# Altium PCB PCBByb2Aver3.PcbDoc
Units mm, origin at the board's own origin, x right, y up, seen from the top; angles counter-clockwise.
Board outline 179 x 104 mm, 2 copper layers (Top Layer, Bottom Layer); 73 components, 29 nets, 141 pads, 20 vias.
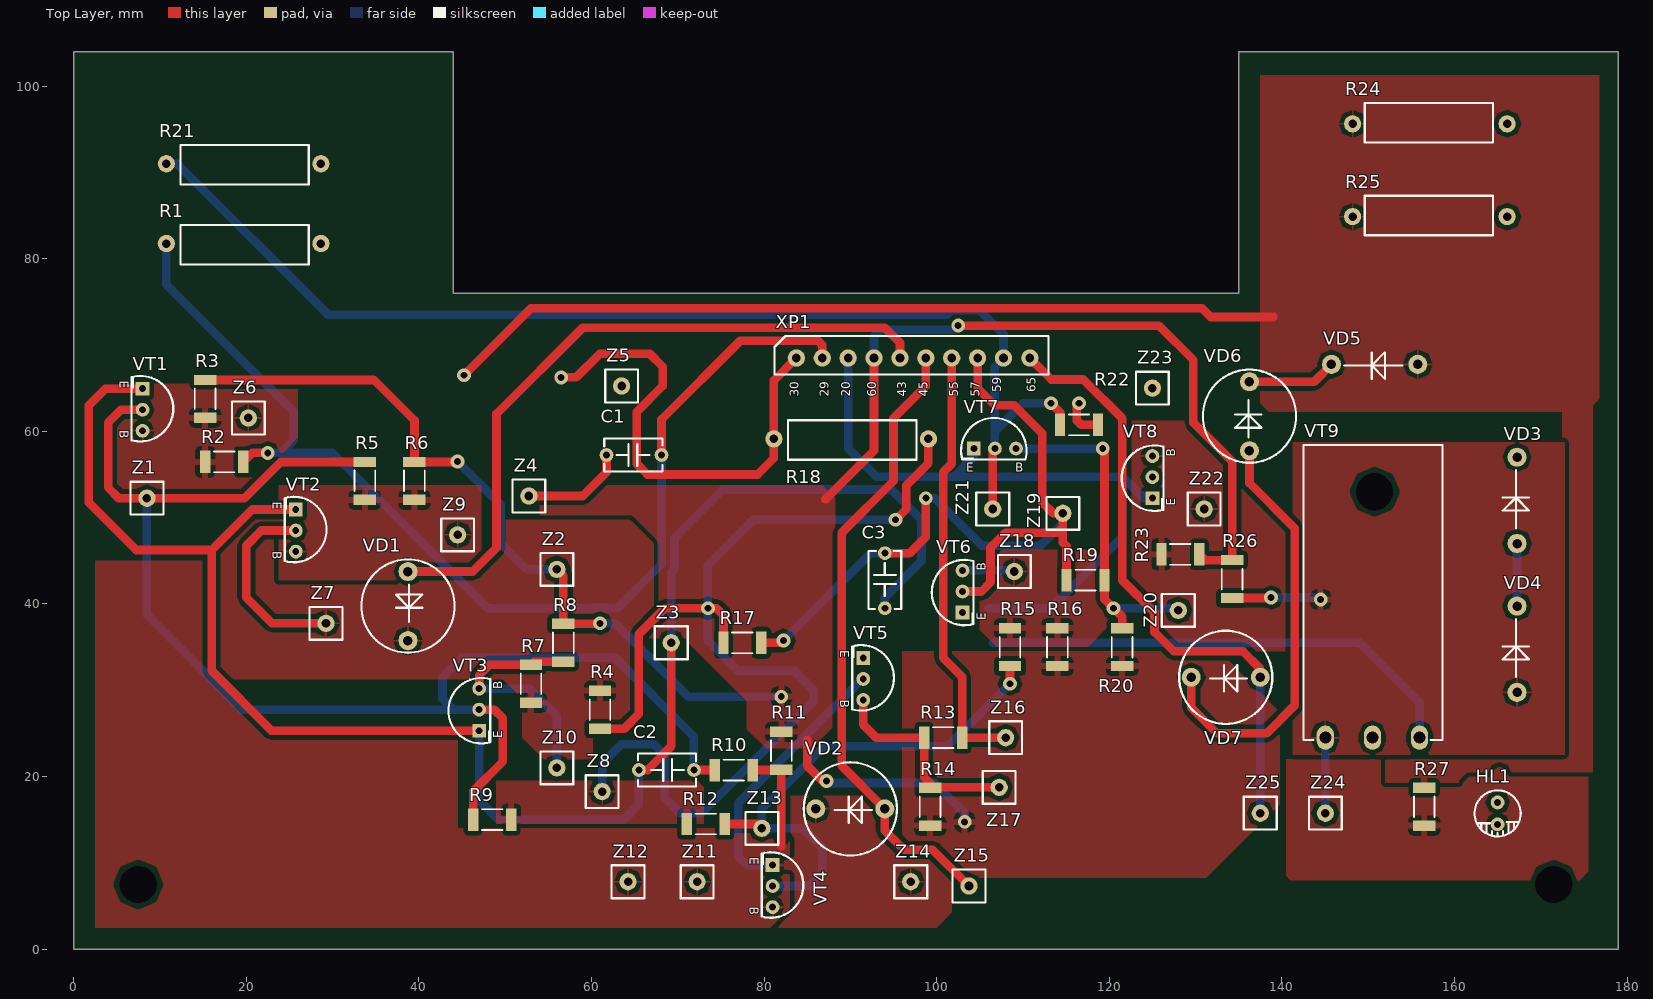
[diagram p0: Top Layer view]
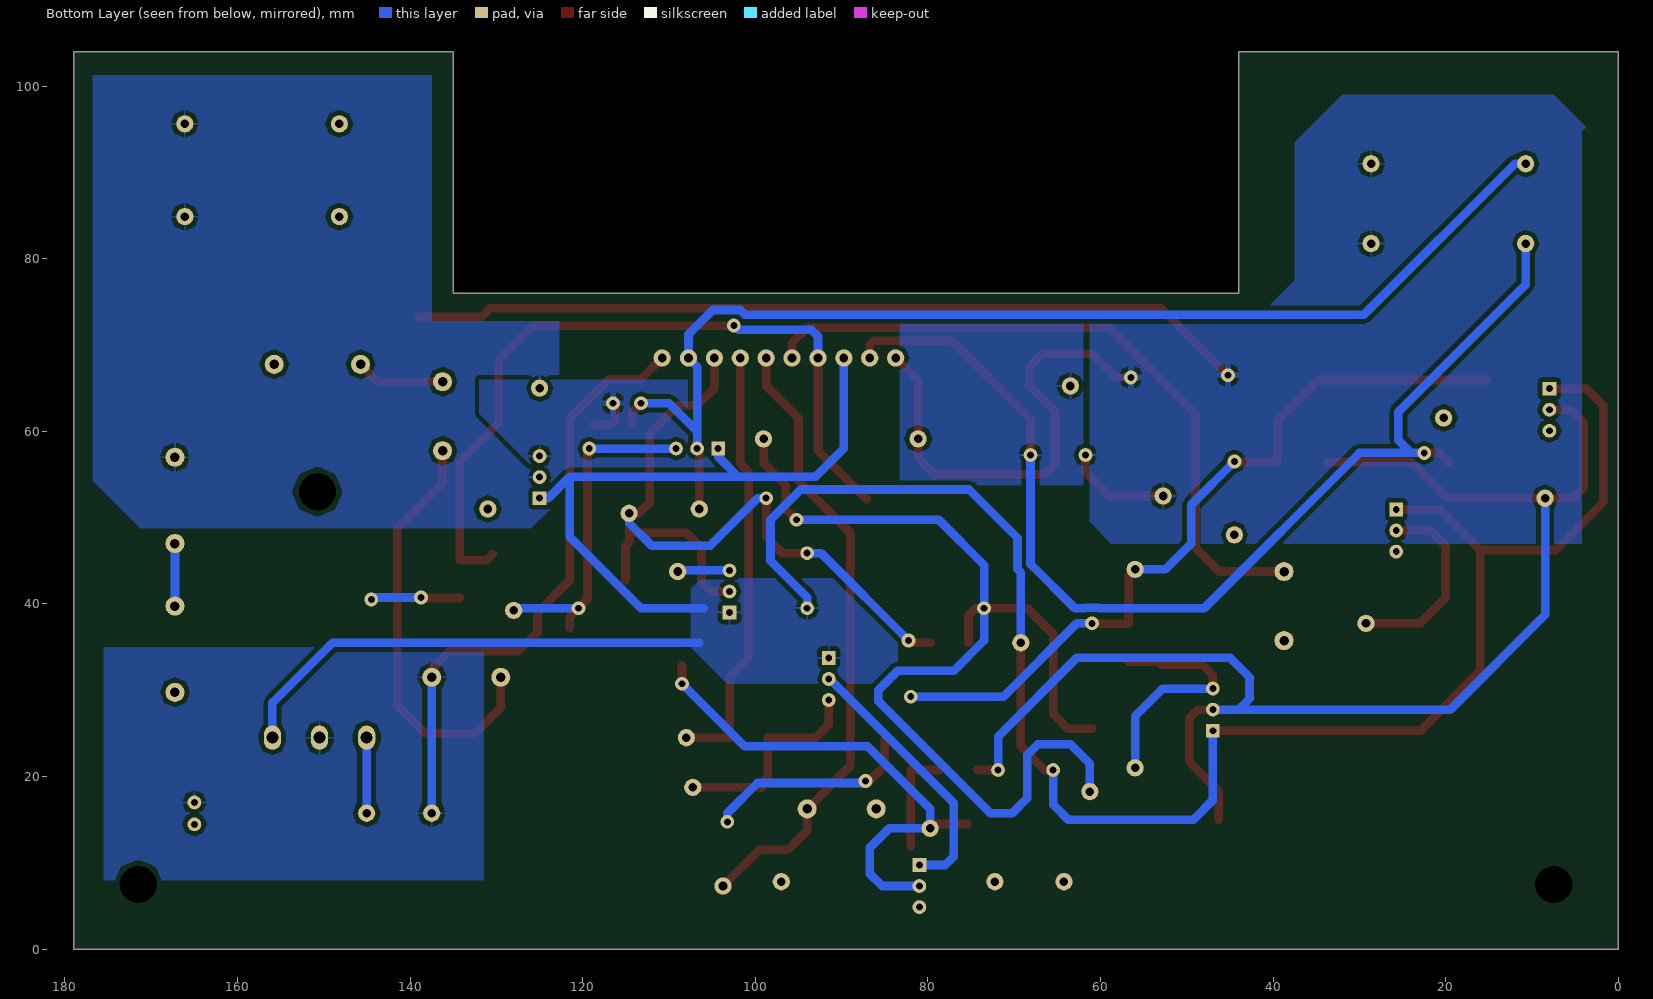
[diagram p1: Bottom Layer view, seen from below]
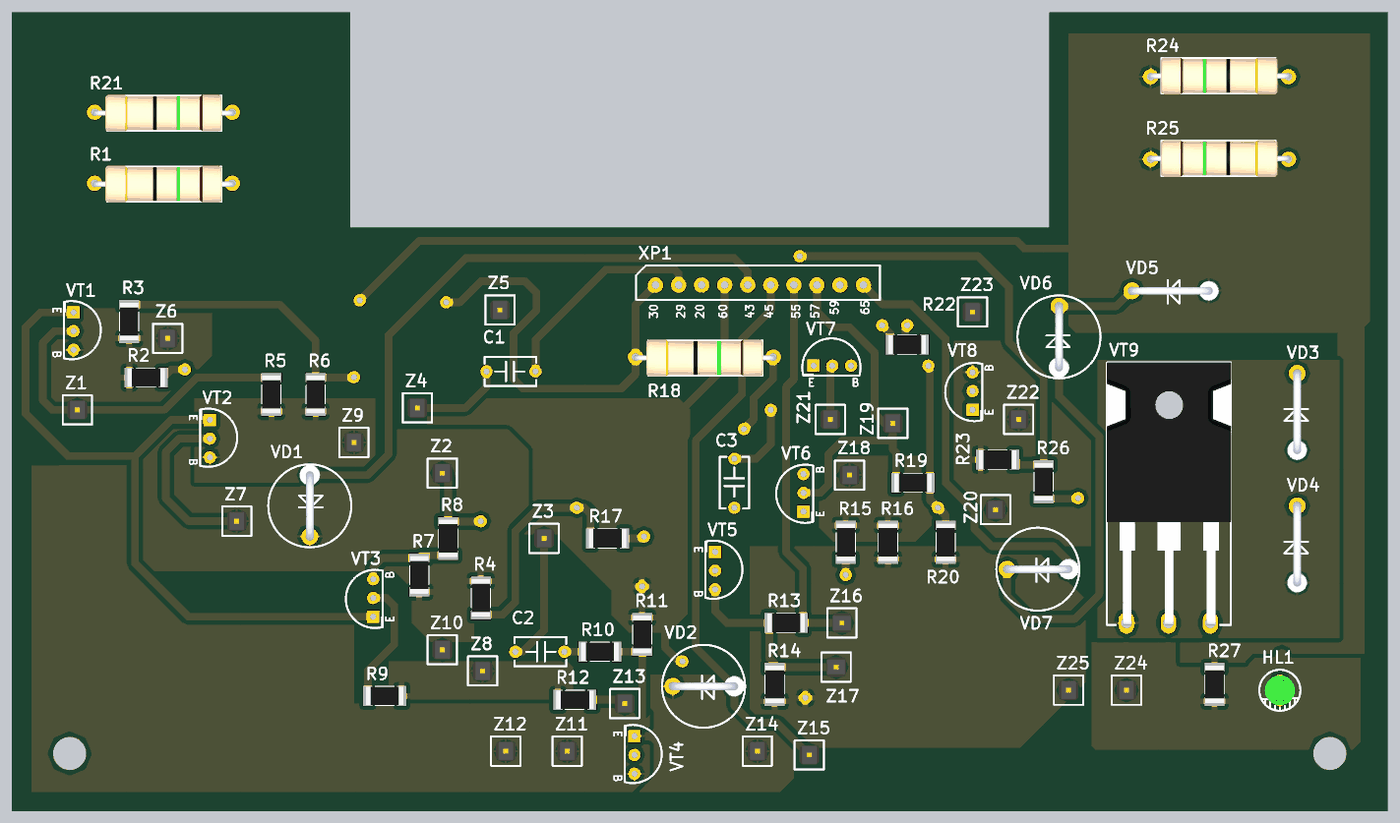
[diagram p2: 3D render of the assembled board from above, using the file's embedded part models]

## Layer stack, top to bottom
Top Solder: solder mask 0.0102, Solder Resist, Dk 3.5
Top Layer: signal copper 0.0356
Dielectric 1: dielectric 0.32, FR-4, Dk 4.8
Bottom Layer: signal copper 0.0356
Bottom Solder: solder mask 0.0102, Solder Resist, Dk 3.5

## Board outline
0,0 0,104 44,104 44,76 135,76 135,104 179,104 179,0

## Design rules (kind name [scope] priority, off if disabled: settings)
Clearance [All] p1: gap=0.5 ignorepadtopadclearanceinfootprint=FALSE
PlaneClearance [All] p1: clearance=0.75
PlaneConnect [All] p1: planeconnectstyle=Relief reliefexpansion=0.75 reliefentries=4 reliefconductorwidth=0.75 reliefairgap=0.5
PolygonConnect [All] p1: thpad.connectstyle=Relief thpad.reliefconductorwidth=0.254 thpad.reliefentries=4 thpad.polygonreliefangle="90 Angle" thpad.airgapwidth=0.5 smdpad.connectstyle=Relief smdpad.reliefconductorwidth=0.75 smdpad.reliefentries=4 smdpad.polygonreliefangle="90 Angle" smdpad.airgapwidth=0.5 via.connectstyle=Relief via.reliefconductorwidth=0.75 via.reliefentries=4 via.polygonreliefangle="90 Angle" via.airgapwidth=0.5
RoutingVias [All] p1: holewidth=0.8 width=1.6 viastyle="Through Hole" minholewidth=0.8 minwidth=1.6 maxholewidth=0.8 maxwidth=1.6
SolderMaskExpansion [All] p1: expansion=0.102
Width [All] p1: maxlimit=3 minlimit=0.5 preferedwidth=1.5
28 further rules are at their usual default settings.

## Components (designator, comment, footprint, x,y, rotation, side; value= is the part's Value field where it differs from the comment)
C1 "Capasitor" Capasitor 61.75,57.25 r0 top value=0.25uF
C2 "Capasitor" Capasitor 71.88,20.75 r180 top value=0.25uF
C3 "Capasitor" Capasitor 94,45.88 r270 top value=0.25uF
HL1 "Led" GNLR 165,17 r270 top
R1 "Resistor_1/2W" Resistor_2W 1.606,81.877 r0 top value=470
R2 "Resistor_1/2W" RESC5025L 17.45,56.45 r0 top value=1k2
R3 "Resistor_1/2W" RESC5025L 15.25,63.75 r270 top value=680
R4 "Resistor_1/2W" RESC5025L 61,27.75 r270 top value=820
R5 "Resistor_1/2W" RESC5025L 33.75,54.25 r90 top value=820
R6 "Resistor_1/2W" RESC5025L 39.5,54.25 r270 top value=3k9
R7 "Resistor_1/2W" RESC5025L 53,30.75 r270 top value=820
R8 "Resistor_1/2W" RESC5025L 56.75,35.5 r270 top value=3k9
R9 "Resistor_1/2W" RESC5025L 48.5,15 r0 top value=820
R10 "Resistor_1/2W" RESC5025L 76.5,20.75 r180 top value=820
R11 "Resistor_1/2W" RESC5025L 82,23 r270 top value=3k9
R12 "Resistor_1/2W" RESC5025L 73.25,14.5 r180 top value=820
R13 "Resistor_1/2W" RESC5025L 100.75,24.5 r0 top value=820
R14 "Resistor_1/2W" RESC5025L 99.25,16.5 r90 top value=3k9
R15 "Resistor_1/2W" RESC5025L 108.5,35 r270 top value=820
R16 "Resistor_1/2W" RESC5025L 114,35 r90 top value=3k9
R17 "Resistor_1/2W" RESC5025L 77.5,35.5 r180 top value=820
R18 "Resistor_1/2W" Resistor_2W 72,59.25 r0 top value=220
R19 "Resistor_1/2W" RESC5025L 117.25,42.75 r180 top value=560
R20 "Resistor_1/2W" RESC5025L 121.5,35 r90 top value=3k3
R21 "Resistor_1/2W" Resistor_2W 1.606,91.127 r0 top value=560
R22 "Resistor_1/2W" RESC5025L 116.5,60.75 r180 top value=560
R23 "Resistor_1/2W" RESC5025L 128.25,45.75 r180 top value=3k3
R24 "Resistor_1/2W" Resistor_2W 175.25,95.5 r180 top value=560
R25 "Resistor_1/2W" Resistor_2W 175.25,84.75 r180 top value=560
R26 "Resistor_1/2W" RESC5025L 134.25,42.88 r270 top value=560
R27 "Resistor_1/2W" RESC5025L 156.5,16.5 r270 top value=3k3
VD1 "Diode" DO-41-vertical 38.75,43.75 r270 top
VD2 "Diode" DO-41-vertical 94,16.25 r180 top
VD3 "Diode" DO-15-Vertical 167.25,47 r90 top
VD4 "Diode" DO-15-Vertical 167.25,29.75 r90 top
VD5 "Diode" DO-15-Vertical 155.75,67.75 r180 top
VD6 "stabilizater" DO-41-vertical 136.25,57.75 r90 top
VD7 "stabilizater" DO-41-vertical 137.5,31.5 r180 top
VT1 "Bipolar Transistor" TO-92 8,64.94 r270 top
VT2 "Bipolar Transistor" TO-92 25.75,50.94 r270 top
VT3 "Bipolar Transistor" TO-92 47,25.31 r90 top
VT4 "Bipolar Transistor" TO-92 81,9.75 r270 top
VT5 "Bipolar Transistor" TO-92 91.5,33.75 r270 top
VT6 "Bipolar Transistor" TO-92 103,39 r90 top
VT7 "Bipolar Transistor" TO-92 104.31,58 r0 top
VT8 "Bipolar Transistor" TO-92 125,52.25 r90 top
VT9 "2sb688" TO-247-3 145.04,24.5 r0 top
XP1 "Connector" Connector 83.75,68.5 r0 top
Z1 "point_control" point_control 8.5,52.25 r0 top
Z2 "point_control" point_control 56,44 r0 top
Z3 "point_control" point_control 69.25,35.5 r0 top
Z4 "point_control" point_control 52.75,52.5 r0 top
Z5 "point_control" point_control 63.5,65.25 r0 top
Z6 "point_control" point_control 20.25,61.55 r180 top
Z7 "point_control" point_control 29.25,37.75 r180 top
Z8 "point_control" point_control 61.25,18.25 r0 top
Z9 "point_control" point_control 44.5,48 r0 top
Z10 "point_control" point_control 56,21.007 r0 top
Z11 "point_control" point_control 72.25,7.81 r0 top
Z12 "point_control" point_control 64.25,7.81 r0 top
Z13 "point_control" point_control 79.75,14 r0 top
Z14 "point_control" point_control 97,7.81 r0 top
Z15 "point_control" point_control 103.75,7.31 r0 top
Z16 "point_control" point_control 108,24.5 r90 top
Z17 "point_control" point_control 107.25,18.75 r90 top
Z18 "point_control" point_control 109,43.75 r0 top
Z19 "point_control" point_control 114.63,50.5 r0 top
Z20 "point_control" point_control 128,39.25 r0 top
Z21 "point_control" point_control 106.5,51 r0 top
Z22 "point_control" point_control 131,51 r0 top
Z23 "point_control" point_control 125,65 r0 top
Z24 "point_control" point_control 145.04,15.75 r0 top
Z25 "point_control" point_control 137.5,15.75 r0 top

## Footprints (in the part's own frame and the unit in brackets; to place one, negate y for a bottom-side part, rotate by r counter-clockwise, add the part's x,y. Pads: shape width x height; smd on the part's side, far side on the other; paste and mask are expansions set on the pad)
Capasitor [mm]
  round 1.6 hole 0.8: 1(0,0) 2(6.38,0)
  silkscreen extent -0.25,-1.91 6.48,1.91, body extent -0.32,-2.93 6.58,2.98, height 7.17
Connector [mm]
  round 2 hole 1: 1(0,0) 2(3,0) 3(6,0) 4(9,0) 5(12,0) 6(15,0) 7(18,0) 8(21,0) 9(24,0) 10(27.051,0)
  silkscreen extent -2.54,-1.91 29.21,2.54
DO-15-Vertical [mm]
  round 2.2 hole 1.1: 1(0,0) 2(10,0)
  silkscreen extent 1.78,-1.4 8.51,1.65, body extent -1.3,-1.3 10.5,1.3, height 8.38
DO-41-vertical [mm]
  round 2.2 hole 1.1: 1(0,0) 2(8,0)
  silkscreen extent -1.4,-5.4 9.4,5.4, body extent -1.35,-1.35 8.5,1.35, height 12.1
GNLR [mm]
  round 1.6 hole 0.8: 1(0,0) 2(2.54,0)
  silkscreen extent -1.4,-2.67 3.94,2.67, body extent -0.68,-1.95 3.22,1.95, height 8
point_control [mm]
  round 2 hole 1: 1(0,0)
  silkscreen extent -1.91,-1.91 1.91,1.91, body extent -1.27,-1.27 1.27,1.27, height 10
RESC5025L [mm] "Chip Resistor, Body 5.0x2.5mm, IPC High Density"
  rect 1.2x2.6 smd: 1(-2.2,0) 2(2.2,0)
  silkscreen extent -1.2,-1.2 1.2,1.2, body extent -2.45,-1.2 2.45,1.2, height 0.55
Resistor_2W [mm]
  round 2 hole 1: 1(9.144,-0.127) 2(27.051,-0.127)
  silkscreen extent 10.79,-2.54 25.65,2.03, body extent 8.89,-2.62 27.38,2.16, height 5.02
TO-92 [mm]
  rect 1.6x1.6 hole 0.8: 1(0,0)
  round 1.6 hole 0.8: 2(2.44,0) 3(4.88,0)
  silkscreen extent -1.47,-1.27 6.11,3.56, body extent -0.38,-0.96 5.2,2.48, height 7.37
TO-247-3 [mm]
  oval 2x2.8 hole 1.4: 1(0,0) 2(5.46,0) 3(10.92,0)
  silkscreen extent -2.54,-0.25 13.59,33.91, body extent -2.54,-0.25 13.66,33.95, height 5.5

## Part data
C2 C3: Voltage=160B, Marka=ELM
HL1: Color=Green, Marka=АЛ-203
R1 R18 R21 R24 R25: package=5020, Power=2W
  R1: Marka=RES2010
  R18 R21 R24 R25: Marka=R2010
R2 R3: Power=0.5W
R4 R5 R6 R7 R8 R9 R10 R11 R12: package=2010, Power=0.5W
  R4: Marka=R5025
  R5 R7: Marka=R5020
  R6: Marka=RE5020
  R8 R9 R10 R11 R12: Marka=RES5020
R13 R14 R15 R16 R17 R19 R20 R22 R23 R26 R27: package=5020, Power=0.5W, Marka=R2010
VD1 VD2 VD6 VD7: package=DO-41
  VD1 VD2: Marka=HER105
  VD6 VD7: Marka=BZx85
VD3 VD4 VD5: package=DO-15, Marka=SF-28
VT9: package=TO-247, Marka=2SB688
C1: Marka=EMN1223
VT1: Marka=bc640

## Free pads (board coordinates)
  round 0 hole 4.3: 0(150.75,53)
  rect 1.6x1.6 hole 4.3: 0(171.5,7.5) 2(7.5,7.5)

## Via types
v1: diameter 1.6, hole 0.8, Top Layer to Bottom Layer, 20 vias

## Nets (pads, with @x,y where several pads share a name; then routed paths per layer and width w, separated by ;. In a path a pad name is that pad's centre, name@x,y a point inside that pad or via, vN(x,y) a via of type N, cw(c..) or ccw(c..) an arc to the next point about the centre after c; other vN are vias at no path point)
20: C2.2 C3.2 VT1.1 VT2.1 VT3.1 VT5.1 VT6.1 VT7.1 VT8.1 VT9.3 XP1.3 Z3.1 | length 334.8
  Top Layer w1: VT1.1 3.69,64.94 1.75,63 1.75,51.75 7.25,46.25 16,46.25 ; VT2.1 20.69,50.94 16,46.25 ; VT3.1 22.94,25.31 16,32.25 16,46.25 ; C2.2 66.5,20.75 69.25,23.5 Z3.1
  Bottom Layer w1: VT3.1 47,17.25 49.25,15 63.75,15 65.5,16.75 C2.2 ; Z3.1 69.25,43.629 69.63,44.009 69.63,47.63 75.25,53.25 94.75,53.25 98.25,49.75 98.25,45 94,40.75 C3.2 ; XP1.3 89.75,58 93,54.75 102,54.75 ; VT7.1 104.31,57.06 102,54.75 ; 106,39.5 113.25,39.5 121.5,47.75 121.5,54.75 ; 106.5,35.5 149,35.5 155.96,28.54 VT9.3 ; VT8.1 124,52.25 121.5,54.75 ; 102,54.75 121.5,54.75
29: C1.2 R1.1 R2.2 XP1.2 Z5.1 | length 130.4
  Top Layer w1: R2.2 20.7,57.5 v1(22.5,57.5) ; C1.2 68.13,61.38 77.25,70.5 86.25,70.5 86.75,70 XP1.2
  Bottom Layer w1: R1.1 10.75,77 25.5,62.25 25.5,59 24,57.5 ; v1(22.5,57.5) 24,57.5 ; C1.2 68.13,44.63 63,39.5 61.796,39.5 61.746,39.55 60.254,39.55 60.204,39.5 48,39.5 30,57.5 24,57.5
30: C1.1 R1.2 R18.1 R21.2 R24.2 R25.2 R27.1 VD5.1 XP1.1 Z4.1 | length 165.8
  Top Layer w1: v1(45.25,66.5) 53,74.25 130.75,74.25 131.75,73.25 139,73.25 ; Z4.1 59,52.5 61.75,55.25 C1.1 ; v1(56.5,66.25) 58.25,66.25 61,69 66.75,69 68.25,67.5 68.25,65.25 65.25,62.25 65.25,56.25 66.5,55 79.25,55 81.144,56.894 R18.1 81.144,65.894 XP1.1
  Bottom Layer w1: v1@56.25,66.5 v1(56.5,66.25)
40: R4.2 R9.2 R12.2 R17.2 R18.2 Z8.1 | length 128.8
  Top Layer w1: R4.2 63.8,25.55 65.5,27.25 65.5,36.5 68.5,39.5 v1(73.5,39.5) 74.5,39.5 75.3,38.7 R17.2 ; v1(95.25,49.75) 96.5,51 96.5,53.75 99.051,56.301 R18.2
  Bottom Layer w1: Z8.1 61.25,21.5 63.5,23.75 67.25,23.75 68.5,22.5 68.5,17.5 70.25,15.75 72.75,15.75 85.75,28.75 85.75,30 83.5,32.25 77,32.25 73.5,35.75 v1(73.5,39.5) 73.5,44.5 78.75,49.75 v1(95.25,49.75)
45: R2.1 R3.2 VT1.3 Z6.1
46: R5.1 R6.2 VT2.3 Z9.1
47: R4.1 R7.2 VD1.2 VT2.2 Z7.1 | length 23
  Top Layer w1: VT2.2 21.75,48.5 20,46.75 20,40.75 23,37.75 Z7.1
48: R7.1 R8.2 VT3.3 Z10.1 | length 28.3
  Top Layer w1: VT3.3 47,31.75 48.2,32.95 R7.1 53.35,33.3 R8.2
  Bottom Layer w1: VT3.3 52.81,30.19 56,27 Z10.1
50: C2.1 R5.2 R9.1 R10.2 VT1.2 VT3.2 Z1.1 | length 161.4
  Top Layer w1: VT1.2 5.5,62.5 4,61 4,53.5 5.25,52.25 Z1.1 19.796,52.25 23.996,56.45 R5.2 ; R9.1 46.3,18.3 49.75,21.75 49.75,26.75 48.75,27.75 VT3.2 ; C2.1 R10.2
  Bottom Layer w1: Z1.1 8.5,38.75 19.5,27.75 44,27.75 ; VT3.2 44,27.75 ; C2.1 71.88,24.62 62.75,33.75 45,33.75 42.75,31.5 42.75,29 44,27.75
51: R10.1 R11.2 VT4.3 Z11.1 Z12.1 | length 12.2
  Top Layer w1: R10.1 81.95,20.75 R11.2 82,11.918
52: VD2.2 VT4.1 VT5.2 Z14.1 | length 31
  Bottom Layer w1: VT4.1 78,9.75 77,10.75 77,16.916 91.394,31.31 VT5.2
53: R12.1 R15.2 VT4.2 Z13.1 | length 60.8
  Top Layer w1: R12.1 79.25,14.5 Z13.1 ; v1(108.5,30.75) R15.2
  Bottom Layer w1: VT4.2 85.31,7.31 86.75,8.75 86.75,11.75 84.5,14 Z13.1 79.75,16.25 87,23.5 101.25,23.5 v1(108.5,30.75)
56: R15.1 R16.2 VT6.3 Z18.1 | length 6.1
  Bottom Layer w1: VT6.3 108.87,43.88 Z18.1
57: C3.1 R17.1 R19.2 VT6.2 XP1.8 Z19.1 | length 98
  Top Layer w1: R17.1 82,35.5 v1(82.25,35.75) ; C3.1 96.88,45.88 98.75,47.75 v1(98.75,52.25) ; VT6.2 105.19,41.44 106.25,42.5 106.25,46.5 108,48.25 114,48.25 114.63,48.88 ; XP1.8 104.75,65 106.75,63 109,63 112.25,59.75 112.25,51.75 113.5,50.5 Z19.1 114.63,48.88 ; R19.2 115.05,46.7 114.63,47.12 114.63,48.88
  Bottom Layer w1: v1(82.25,35.75) 92.38,45.88 C3.1 ; v1(98.75,52.25) 99.75,52.25 105.25,46.75 112,46.75 114.63,49.38 Z19.1
58: R19.1 R20.2 VT7.3 Z20.1 | length 39.4
  Top Layer w1: v1(119.25,58) 119.45,57.8 R19.1 119.45,40.55 v1(120.5,39.5) 121.5,38.5 R20.2
  Bottom Layer w1: VT7.3 v1(119.25,58) ; v1(120.5,39.5) 127.75,39.5 Z20.1
59: R21.1 R22.2 VT7.2 XP1.9 Z21.1 | length 137.2
  Top Layer w1: Z21.1 106.5,57.75 VT7.2 ; v1(113.25,63.25) 114.3,62.2 R22.2
  Bottom Layer w1: R21.1 12,91 29.5,73.5 101.204,73.5 101.754,74.05 104.95,74.05 107.75,71.25 XP1.9 106.75,67.5 106.75,60 ; VT7.2 106.75,60 ; v1(113.25,63.25) 110,63.25 106.75,60
60: R3.1 R6.1 R8.1 R11.1 R14.1 R16.1 R20.1 R23.1 R26.1 XP1.4 Z2.1 | length 204.8
  Top Layer w1: R3.1 34.8,65.95 39.5,61.25 R6.1 44.45,56.45 v1(44.5,56.5) ; Z2.1 56.75,43.25 R8.1 60.95,37.7 v1(61,37.75) ; 85,24.25 85,21.25 86.75,19.5 v1(87.25,19.5) ; 87.125,52.125 92.75,57.75 XP1.4 ; v1(102.5,72.25) 125.75,72.25 129.75,68.25 129.75,61 134.25,56.5 R26.1 131.12,45.08 R23.1
  Bottom Layer w1: v1(44.5,56.5) 49.5,51.5 49.5,47 52.5,44 Z2.1 ; v1(61,37.75) 62.75,37.75 71.25,29.25 v1(82,29.25) ; v1(87.25,19.5) 87.5,19.25 99.75,19.25 103.25,15.75 v1(103.25,14.75) ; XP1.4 92.75,71 93.5,71.75 102,71.75 v1(102.5,72.25)
61: R22.1 R23.2 VT8.3 Z22.1 | length 4.8
  Top Layer w1: v1(116.5,63.25) 116.25,63 116.25,61.25 116.75,60.75 R22.1
62: R24.1 R25.1 VD3.2 VT8.2 Z23.1 | length 0.2
  Bottom Layer w1: VD3.2 VD3.2@167.25,57.25
63: R26.2 VD4.1 VT9.1 Z24.1 | length 19.9
  Top Layer w1: R26.2 138.68,40.68 v1(138.75,40.75) ; VT9.1@144.5,25.04 VT9.1
  Bottom Layer w1: v1(138.75,40.75) 144.25,40.75 v1(144.5,40.5) ; Z24.1 VT9.1
65: HL1.1 VD7.1 VT9.2 XP1.10 Z25.1 | length 70.7
  Top Layer w1: XP1.10 113.301,66 117,66 121.5,61.5 121.5,42.75 125.25,39 125.25,36.75 127.5,34.5 135.5,34.5 137.5,32.5 VD7.1
  Bottom Layer w1: Z25.1 VD7.1
NetHL1_2: HL1.2 R27.2
NetR13_1: R13.1 R14.2 VT5.3 Z17.1 | length 24.7
  Top Layer w1: VT5.3 91.5,26 93,24.5 R13.1 98.55,19.95 99.25,19.25 R14.2 99.3,18.75 Z17.1
NetVD3_1: VD3.1 VD4.2 | length 7.3
  Bottom Layer w1: VD4.2 VD3.1
NetVD5_2: VD5.2 VD6.2 | length 10.3
  Top Layer w1: VD6.2 143.75,65.75 VD5.2
NetVD6_1: VD6.1 VD7.2 | length 49.8
  Top Layer w1: VD7.2 129.5,28 132.5,25 138.25,25 141.5,28.25 141.5,48.75 136.25,54 VD6.1
x7/2a: VD1.1 XP1.5 | length 80.3
  Top Layer w1: VD1.1 46.25,43.75 49,46.5 49,62 59,72 94,72 95.75,70.25 XP1.5
x7/3a: R13.2 XP1.7 Z16.1 | length 50.4
  Top Layer w1: XP1.7 101.75,56.25 100.75,55.25 100.75,33.75 102.95,31.55 R13.2 Z16.1
x7/4a: VD2.1 XP1.6 Z15.1 | length 73.3
  Top Layer w1: XP1.6 98.75,65.25 95,61.5 95,54.25 89,48.25 89,21.25 VD2.1 94,13.75 96.25,11.5 99.56,11.5 Z15.1

## Polygon pours and split planes (outlines as drawn)
61 on Top Layer "Top Overlay-No Net" (solid, remove dead copper, pour order 32): 121,61.25 121,40.5 123,38.5 123,35 123.5,34.5 141,34.5 147.25,40.75 147.25,61.25
63 on Top Layer "Top Overlay-No Net" (solid, remove dead copper, pour order 28): 141.25,58.75 141.25,22.5 172.75,22.5 172.75,58.75
46 on Top Layer "Top Overlay-No Net" (solid, remove dead copper, pour order 0): 23.75,53.75 23.75,42.75 47.25,42.75 47.25,53.75
45 on Top Layer "Top Overlay-No Net" (solid, remove dead copper, pour order 6): 4.5,53.75 5.5,52.75 19.5,52.75 26,59.25 26,65.5 6.5,65.5 4.5,63.5
47 on Top Layer "Top Overlay-No Net" (solid, remove dead copper, pour order 2): 49.75,31.25 52,29 52,24.5 54.5,22 64,22 67.25,25.25 67.25,47 64.5,49.75 52.25,49.75 15.635,49.75 15.635,31.25
51 on Top Layer "Top Overlay-No Net" (solid, remove dead copper, pour order 10): 2.5,45 2.5,2.5 80.75,2.5 83,4.75 83,12.75 81.75,14 44.5,14 44.5,44.25 43.5,45.25
52 on Top Layer "Top Overlay-No Net" (solid, remove dead copper, pour order 12): 79,2.5 100,2.5 101.75,4.25 101.75,15.5 99.5,17.75 79,17.75
60 on Top Layer "Top Overlay-No Net" (solid, remove dead copper, pour order 20): 54,36 71.25,36 71.25,35.5 78,28.75 78,25.5 80.25,23.25 85.5,23.25 88.25,26 88.25,52.25 86.75,53.75 54,53.75
40 on Top Layer "Top Overlay-No Net" (solid, remove dead copper, pour order 22): 49,13 71.991,13 73,14.009 73,18.75 72.25,19.5 49,19.5
60 on Top Layer "Top Overlay-No Net" (solid, remove dead copper, pour order 16): 96,12.5 96.5,12 99.75,12 103.5,8.25 131.25,8.25 139.75,16.75 139.75,27.5 132.75,34.5 96,34.5
56 on Top Layer "Top Overlay-No Net" (solid, remove dead copper, pour order 26): 105,46.25 105,37 107.25,34.75 117.25,34.75 119.75,37.25 119.75,46.25
30 on Top Layer "Top Overlay-No Net" (solid, remove dead copper, pour order 38): 137.5,101.25 137.5,63.25 138.5,62.25 175.25,62.25 176.75,63.75 176.75,101.25
30 on Top Layer "Top Overlay-No Net" (solid, remove dead copper, pour order 46): 152,17 159,17 160.5,18.5 160.5,19.5 161.5,20.5 176,20.5 176,64.5 172.5,64.5 172.5,22 152,22
NetHL1_2 on Top Layer "Top Overlay-No Net" (solid, remove dead copper, pour order 48): 140.5,22 140.5,8.5 141,8 174.5,8 175.5,9 175.5,22
20 on Bottom Layer "Top Overlay-No Net" (solid, remove dead copper, pour order 24): 83.5,36.25 83.5,33.25 86,30.75 103.25,30.75 107.5,35 107.5,41.75 106.25,43 90.25,43
61 on Bottom Layer "Top Overlay-No Net" (solid, remove dead copper, pour order 34): 100,66 100,47.75 101.25,46.5 125,46.5 132,53.5 132,66
62 on Bottom Layer "Top Overlay-No Net" (solid, remove dead copper, pour order 36): 122.75,72.75 122.75,52 126,48.75 171.25,48.75 176.75,54.25 176.75,72.75
62 on Bottom Layer "Top Overlay-No Net" (solid, remove dead copper, pour order 40): 137.5,101.25 176.75,101.25 176.75,54.25 171.25,48.75 137.5,48.75
30 on Bottom Layer "Top Overlay-No Net" (solid, remove dead copper, pour order 4): 58.75,47 61.25,49.5 61.25,74 60.75,73.5 40.75,73.5 40.75,74.25 37.5,77.5 37.5,93.5 32,99 7.5,99 3.75,95.25 4.25,94.75 4.25,47
29 on Bottom Layer "Top Overlay-No Net" (solid, remove dead copper, pour order 42): 62,72.5 62,53.75 83.25,53.75 83.25,72.5
65 on Bottom Layer "Top Overlay-No Net" (solid, remove dead copper, pour order 50): 131.5,35 131.5,8 175.5,8 175.5,35

## Silkscreen, mask and mechanical layers (free items; w line width, h text height)
Top Overlay:
  text "59" at 107.5,64.5 h1 r90
  text "65" at 111.5,64.5 h1 r90
  text "30" at 84,64 h1 r90
  text "29" at 87.5,64 h1 r90
  text "20" at 90,64 h1 r90
  text "60" at 93,64 h1 r90
  text "43" at 96.5,64 h1 r90
  text "45" at 99,64 h1 r90
  text "55" at 102.5,64 h1 r90
  text "57" at 105,64 h1 r90
Board:
  the board outline again, w0.254

## Dimensions
135,104 to 179,104 on Size
44,104 to 135,104 on Size
44,104 to 44,76 on Size
0,104 to 44,104 on Size
0,104 to 0,0 on Size
0,0 to 179,0 on Size

## Text inside footprints (layer, text, board x,y; h text height)
VT1: Top Overlay "E" at 5.333,65.829 h1 r270; Top Overlay "B" at 5.333,60.114 h1 r270
VT2: Top Overlay "B" at 23.083,46.114 h1 r270; Top Overlay "E" at 23.083,51.829 h1 r270
VT3: Top Overlay "E" at 49.667,24.421 h1 r90; Top Overlay "B" at 49.667,30.136 h1 r90
VT4: Top Overlay "B" at 78.333,4.924 h1 r270; Top Overlay "E" at 78.333,10.639 h1 r270
VT5: Top Overlay "E" at 88.833,34.639 h1 r270; Top Overlay "B" at 88.833,28.924 h1 r270
VT6: Top Overlay "B" at 105.667,43.826 h1 r90; Top Overlay "E" at 105.667,38.111 h1 r90
VT7: Top Overlay "E" at 103.421,55.333 h1; Top Overlay "B" at 109.136,55.333 h1
VT8: Top Overlay "B" at 127.667,57.076 h1 r90; Top Overlay "E" at 127.667,51.361 h1 r90